# Altium PCB PCBtest.PcbDoc
Units mm, origin at the board's own origin, x right, y up, seen from the top; angles counter-clockwise.
Board outline 57 x 24 mm, 2 copper layers (Top Layer, Bottom Layer); 10 components, 10 nets, 28 pads, 0 vias.
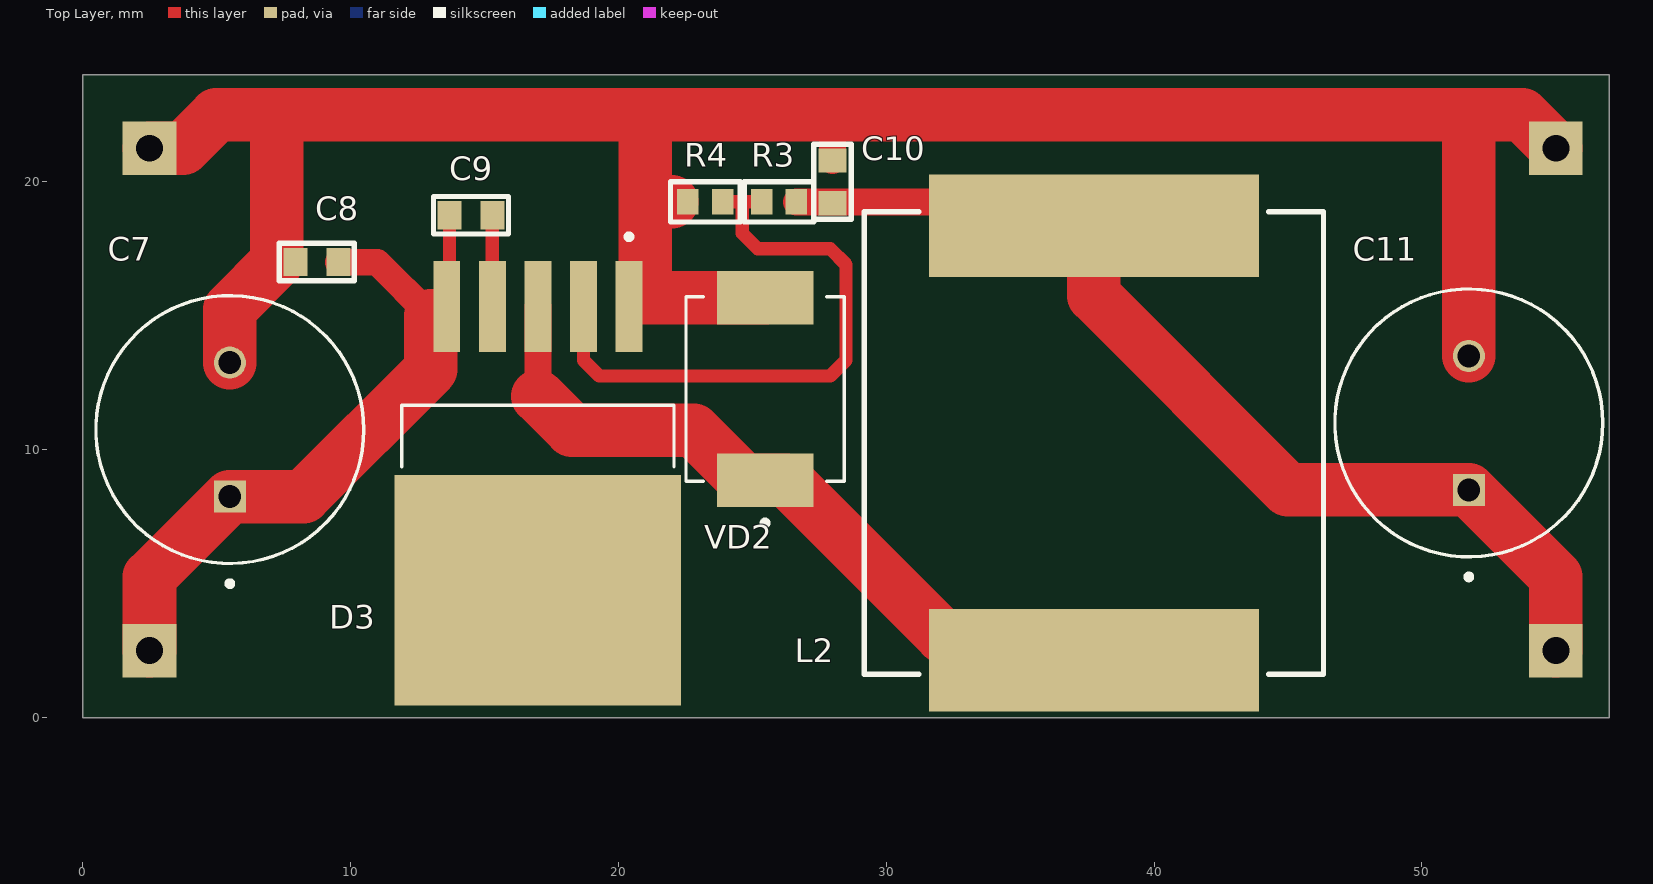
[diagram p0: Top Layer view]
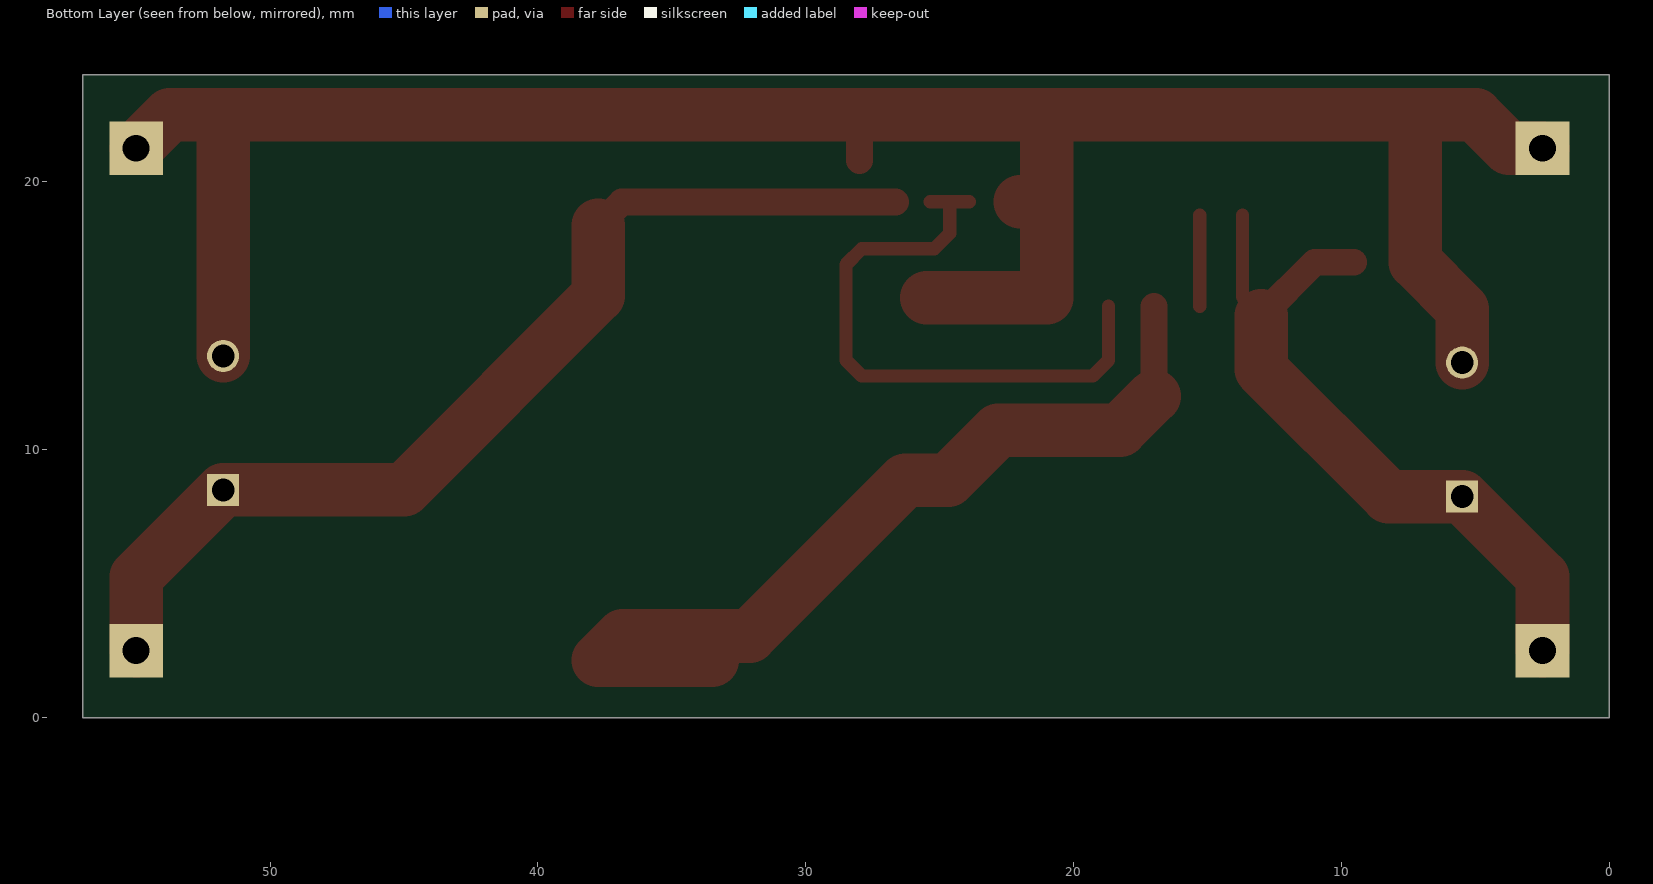
[diagram p1: Bottom Layer view, seen from below]
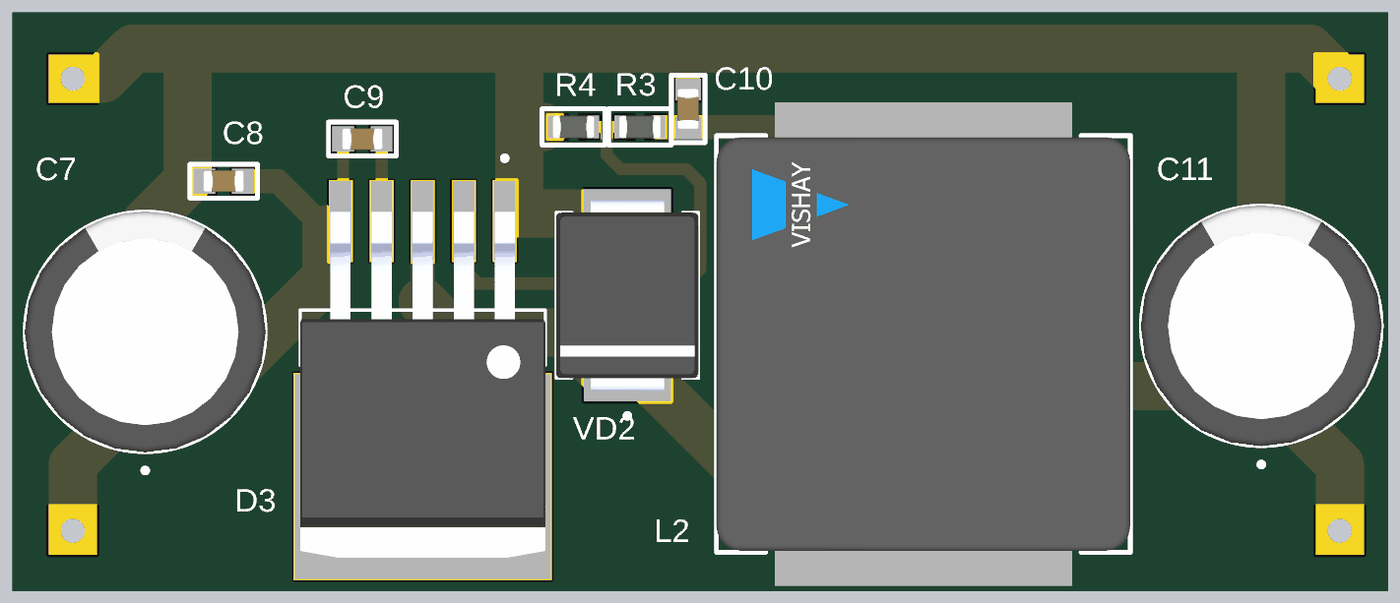
[diagram p2: 3D render of the assembled board from above, using the file's embedded part models]

## Layer stack, top to bottom
Top Solder: solder mask 0.0102, Solder Resist, Dk 3.5
Top Layer: signal copper 0.0356
Dielectric 1: dielectric 0.32, FR-4, Dk 4.8
Bottom Layer: signal copper 0.0356
Bottom Solder: solder mask 0.0102, Solder Resist, Dk 3.5

## Board outline
0,0 57,0 57,24 0,24

## Design rules (kind name [scope] priority, off if disabled: settings)
Clearance [All] p1: gap=0.25 ignorepadtopadclearanceinfootprint=FALSE
PolygonConnect [All] p1: connectstyle=Relief reliefconductorwidth=0.254 reliefentries=4 polygonreliefangle="90 Angle" airgapwidth=0.254
RoutingVias [All] p1: holewidth=0.711 width=1.27 viastyle="Through Hole" minholewidth=0.711 minwidth=1.27 maxholewidth=0.711 maxwidth=1.27
SolderMaskExpansion [All] p1: expansion=0.102 istentingtop=FALSE
SupplyNets "Schematic Supply Nets_3" [InNet('+3.3 В')] p1: voltage=0.000
SupplyNets "Schematic Supply Nets_2" [InNet('GND')] p2: voltage=0.000
SupplyNets "Schematic Supply Nets_1" [InNet('+U_bat')] p3: voltage=0.000
SupplyNets "Schematic Supply Nets" [InNet('+12 В')] p4: voltage=0.000
Width Width_power [(InNet('+12 В') OR InNet('+U_bat') OR InNet('GND') OR InNet('NetD3_3'))] p1: maxlimit=2 minlimit=0.5 preferedwidth=2
Width [All] p2: maxlimit=1 minlimit=0.25 preferedwidth=0.5
30 further rules are at their usual default settings.

## Components (designator, comment, footprint, x,y, rotation, side; value= is the part's Value field where it differs from the comment)
C7 "Конденсатор полевой" "RADIAL-2 10MM" 5.5,10.75 r90 top value="220 мк"
C8 "Конденсатор" 0603C 8.75,17 r0 top value="1 мк"
C9 "Конденсатор" 0603C 14.5,18.75 r180 top value="1 мк"
C10 "Конденсатор" 0603C 28,20 r90 top value="1 мк"
C11 "Конденсатор полевой" "RADIAL-2 10MM" 51.75,11 r90 top value="330 мк"
D3 "XL4015E1" TO-263-5 17,4.75 r270 top
L2 "Inductance" IHLP-6767 37.75,10.25 r90 top value="47 мк"
R3 "Resistor" 0603R 26,19.25 r0 top value="13 к"
R4 "Resistor" 0603R 23.25,19.25 r0 top value="1,5 к"
VD2 "Диод Шоттки" SMC 25.5,12.25 r90 top value={Номинал}

## Footprints (in the part's own frame and the unit in brackets; to place one, negate y for a bottom-side part, rotate by r counter-clockwise, add the part's x,y. Pads: shape width x height; smd on the part's side, far side on the other; paste and mask are expansions set on the pad)
0603C [mm] "Chip Resistor, 2-Leads, Body 1,40x0,80mm, IPC Medium Density"
  rect 0.9x1.05 smd: 1(-0.8,0) 2(0.8,0)
  silkscreen extent -1.4,-0.7 1.4,0.7, body extent -0.85,-0.45 0.85,0.45, height 0.9
0603R [mm] "Chip Resistor, 2-Leads, Body 1.60x0.85mm, IPC Medium Density"
  rect 0.8x0.95 smd: 1(-0.65,0) 2(0.65,0)
  silkscreen extent -1.3,-0.75 1.3,0.75, body extent -0.87,-0.47 0.88,0.48, height 0.9
IHLP-6767 [mm]
  rect 3.825x12.32 smd paste+0 mask+0: 1(-8.117,0) 2(8.117,0)
  silkscreen extent -8.64,-8.57 8.64,8.57, body extent -10.13,-8.67 10.13,8.67, height 0.25
"RADIAL-2 10MM" [mm]
  rect 1.2x1.2 hole 0.85: 1(-2.5,0)
  round 1.2 hole 0.85: 2(2.5,0)
  silkscreen extent -5.85,-5 5,5, body extent -5,-5 5,5, height 12.5
SMC [mm]
  rect 2x3.6 smd: 1(3.415,0.021) 2(-3.385,0.021)
  silkscreen extent -5.08,-2.93 3.45,2.97, body extent -3.96,-2.93 3.99,2.97, height 2.65
TO-263-5 [mm]
  rect 3.4x1 smd paste-0.05 mask+0.07: 1(-10.6,3.4) 2(-10.6,1.7) 3(-10.6,0) 4(-10.6,-1.7) 5(-10.6,-3.4)
  rect 8.6x10.7 smd paste-0.05 mask+0.07: 6(0,0)
  silkscreen extent -13.3,-5.08 -4.62,5.08, body extent -10.98,-5.08 3.38,5.08, height 4.65

## Part data
C7: library part Capacitor_pol, "Конденсатор электролит. 220 мкФ, 50 В, 10мм"
C8 C9 C10: library part Capacitor, "Конденсатор керамический SMD, 1 мкФ, 0603"
C11: library part Capacitor_pol, "Конденсатор электролит. 330 мкФ, 25 В, 10 мм"
D3: "Импульсный DC-DC преобразователь. Вход до 36 В. Регулируемый выход. Выходной ток до 5А."
L2: "Индуктивность экранированная 47 мкГн, 20%, 8.7 А, 42.7 мОм, IHLP6767GZER470M11"
R3: "Резистор SMD, 0603, 13 кОм"
R4: "Резистор SMD 0603, 1.5 кОм"
VD2: library part "Schottky diode", "Диод Шоттки 40 В, 5 А, SMC, B540C-13-F"

## Free pads (board coordinates)
  rect 2x2 hole 1: 3(2.5,2.5) 4(2.5,21.25) 5(55,21.25) 6(55,2.5)

## Nets (pads, with @x,y where several pads share a name; then routed paths per layer and width w, separated by ;. In a path a pad name is that pad's centre, name@x,y a point inside that pad or via, vN(x,y) a via of type N, cw(c..) or ccw(c..) an arc to the next point about the centre after c; other vN are vias at no path point)
"+3.3 В": 
"+12 В": C10.1 C11.1 L2.2 pad.6 R3.2 | length 38.4
  Top Layer w1: R3.2 36.868,19.25 L2.2
  Top Layer w2: L2.2 37.75,15.75 45,8.5 C11.1 55,5.25 pad.6
+U_bat: C7.1 C8.2 C9.2 D3.5 pad.3 | length 26.8
  Top Layer w0.5: 13,15 13.7,15.7 C9.2
  Top Layer w1: C8.2 11,17 13,15
  Top Layer w2: pad.3 2.5,5.25 C7.1 8.25,8.25 13,13 13,15
GND: C7.2 C8.1 C10.2 C11.2 D3.1 pad.4 pad.5 R4.1 VD2.1 | length 86.5
  Top Layer w1: C10.2 28,22.5
  Top Layer w2: pad.4 3.75,21.25 5,22.5 7.319,22.5 ; C7.2 5.5,15.25 7.25,17 7.25,22.431 7.319,22.5 ; 21,19.25 21,22.492 20.992,22.5 ; 22,19.25 21.171,19.25 21,19.079 21,15.665 VD2.1 ; C11.2 51.75,22.444 51.694,22.5 ; pad.5 53.75,22.5 51.694,22.5 ; 7.319,22.5 20.992,22.5 ; 20.992,22.5 28,22.5 51.694,22.5
NetC3_1: 
NetC4_1: 
NetC9_1: C9.1 D3.4 | length 3.4
  Top Layer w0.5: D3.4 15.3,16.55 C9.1
NetD1_8: 
NetD3_2: D3.2 R3.1 R4.2 | length 22.9
  Top Layer w0.5: D3.2 18.7,13.336 19.286,12.75 27.914,12.75 28.5,13.336 28.5,16.914 27.914,17.5 25.211,17.5 24.625,18.086 24.625,19.25 ; R4.2 24.625,19.25 ; R3.1 24.625,19.25
NetD3_3: D3.3 L2.1 VD2.2 | length 32.2
  Top Layer w1: 17,12 D3.3
  Top Layer w2: 17,12 18.271,10.729 22.815,10.729 24.679,8.865 VD2.2 26.279,8.865 32.099,3.045 36.838,3.045 L2.1 ; L2.1@33.503,2.133 L2.1@37.5,2.133
pads on no net: D3.6